# EAGLE board VF_MDS_Panel (EAGLE 9.6.2)
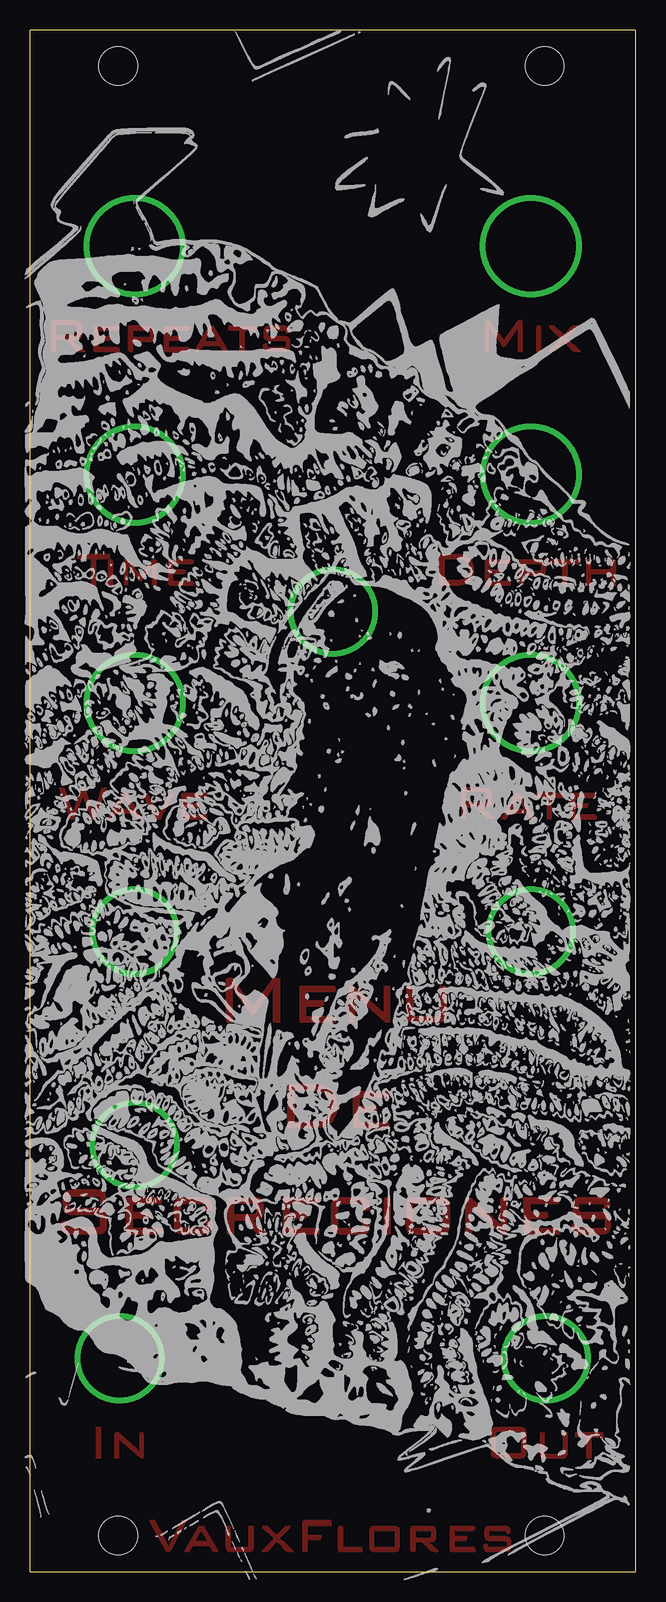
[diagram p0: board, top side]

Size 50.5 x 128.5 mm. Coordinates in mm from the lower left corner, seen from the top.
Copper layers (1*16): Top 0.035mm / dielectric 1.5mm / Bottom 0.035mm
Design rules "default": minimum track width 6mil, minimum drill 0.35mm, track to track 6mil, track to pad 6mil, pad to pad 6mil, via to via 6mil, smd to smd 6mil, copper to edge 40mil, drill to drill 6mil, minimum pad ring 10mil, minimum via ring 8mil, stop-mask expansion 4mil, vias tented up to drill 0mil, thermal gap 10mil
Net classes: 1 power: width 0.61 mm

## Footprints (pad centres in the part's own frame; a part is rotated, then mirrored left to right if it is on the bottom)
EURO_PANEL_10HP = hole 3.2: 7.5,3; 7.5,125.5; 43.06,125.5; 43.06,3

## Placement (x,y rotation side)
U$2  [EURO_PANEL_10HP]  -0.15,0 0 top

## Library data of the parts
U$2 = eurohelper

## Tracks (layer width: path | path; a pad name or v marks a point on that pad's centre or on a via)
GND
  pour Top (rank 3): 13.05,4.22 12.65,4.22 12.54,4.06 11.55,2.09 10.43,4.21 10.23,4.22 10.03,4.22 10.03,4.1 11.28,1.82 11.39,1.67 11.59,1.67 11.75,1.74
  pour Top (rank 3): 15.7,1.67 14.47,3.74 14.29,3.76 14.09,3.76 12.89,1.68 13.08,1.67 13.28,1.67 13.38,1.84 13.47,2.02 13.59,2.16 14.97,2.16 14.82,2.46 13.83,2.46 13.76,2.54 14.25,3.41 14.34,3.33 14.73,2.63 14.82,2.47 14.99,2.15 15.09,1.99 15.19,1.82 15.3,1.67 15.7,1.67
  pour Top (rank 3): 18.65,2.16 18.65,3.57 18.64,3.76 18.44,3.76 18.25,3.75 18.25,2.14 18.21,1.99 16.8,1.99 16.72,2.11 16.72,3.72 16.56,3.76 16.36,3.76 16.32,3.6 16.32,2.19 16.34,1.99 16.4,1.8 16.57,1.7 16.77,1.67 16.97,1.67 18.18,1.67 18.38,1.69 18.55,1.78 18.63,1.96
  pour Top (rank 3): 21.97,1.67 20.8,2.78 20.93,2.93 21.64,3.64 21.73,3.76 21.32,3.76 21.17,3.66 20.63,3.06 20.49,3.09 19.92,3.66 19.76,3.76 19.36,3.76 19.38,3.67 20.25,2.84 20.31,2.69 19.32,1.69 19.48,1.67 19.68,1.67 19.86,1.72 20.53,2.47 20.67,2.42 21.38,1.71 21.57,1.67
  pour Top (rank 3): 25.16,3.87 25.16,4.07 25.1,4.22 22.9,4.22 22.73,4.18 22.73,1.78 22.83,1.67 23.03,1.67 23.16,1.74 23.16,2.54 23.2,2.7 24.2,2.7 24.3,2.8 24.3,3 24.13,3.04 23.33,3.04 23.16,3.07 23.16,3.87 23.35,3.87
  pour Top (rank 3): 27.72,1.67 27.72,1.87 27.64,1.99 26.23,1.99 26.09,2.05 26.09,3.66 26,3.76 25.8,3.76 25.7,3.66 25.7,1.85 25.72,1.67
  pour Top (rank 3): 30.83,2.35 30.83,3.15 30.83,3.35 30.79,3.55 30.67,3.7 30.47,3.75 30.29,3.76 30.3,3.45 30.44,3.4 30.44,2 30.44,1.99 28.83,1.99 28.69,2.04 28.69,3.45 28.88,3.45 30.27,3.45 30.26,3.76 28.87,3.76 28.67,3.76 28.48,3.71 28.34,3.57 28.3,3.37 28.29,3.17 28.29,2.17 28.31,1.97 28.38,1.79 28.56,1.69 28.76,1.67 30.36,1.67 30.56,1.69 30.74,1.78 30.82,1.96 30.83,2.16
  pour Top (rank 3): 33.97,1.77 33.22,2.44 33.28,2.49 33.48,2.5 33.68,2.53 33.82,2.66 33.87,2.85 33.87,3.25 33.86,3.46 33.79,3.64 33.62,3.74 33.42,3.76 31.81,3.76 31.75,3.62 31.75,1.81 31.81,1.67 32.01,1.67 32.14,1.74 32.14,2.34 32.2,2.48 32.21,2.79 32.14,2.91 32.14,3.31 32.2,3.46 33.21,3.46 33.4,3.42 33.48,3.25 33.48,3.05 33.48,2.99 33.42,2.81 33.22,2.78 32.23,2.78 32.21,2.49 32.6,2.49 32.78,2.43 33.5,1.72 33.68,1.67 34.08,1.67
  pour Top (rank 3): 37.14,1.67 37.14,1.87 37.05,1.98 35.45,1.98 35.4,2.13 35.4,2.52 35.52,2.6 36.32,2.6 36.44,2.69 36.44,2.89 36.27,2.91 35.47,2.91 35.4,3.05 35.4,3.45 35.6,3.45 36.99,3.45 37.12,3.52 37.12,3.72 36.96,3.76 35.17,3.76 35.01,3.72 35.01,1.73 35.15,1.67
  pour Top (rank 3): 40.11,2.16 40.11,2.36 40.1,2.56 40.04,2.75 39.88,2.87 39.69,2.91 39.49,2.91 38.29,2.91 38.25,3.08 38.25,3.28 38.28,3.45 39.68,3.45 39.72,3.3 39.8,3.19 39.99,3.24 40.08,3.37 40.03,3.56 39.9,3.7 39.71,3.76 39.51,3.76 38.51,3.76 38.31,3.76 38.11,3.72 37.96,3.61 37.9,3.42 37.89,3.22 37.9,3.02 37.92,2.82 38.03,2.65 38.22,2.59 38.42,2.57 39.62,2.57 39.75,2.51 39.75,2.11 39.67,1.99 38.27,1.99 38.17,2.08 38.17,2.28 37.99,2.26 37.81,2.2 37.82,2 37.88,1.81 38.04,1.7 38.24,1.67 38.44,1.67 39.64,1.67 39.84,1.69 40.01,1.78 40.09,1.96
  pour Top (rank 3): 41.39,10.13 41.39,11.32 41.38,11.52 41.35,11.72 41.26,11.89 41.08,11.98 40.88,12.01 40.68,12.01 39.09,12.01 38.9,12.01 38.9,11.67 40.88,11.67 40.97,11.55 40.97,9.96 40.97,9.82 38.97,9.82 38.86,9.9 38.86,11.5 38.89,11.65 38.88,12 38.7,11.97 38.53,11.86 38.46,11.68 38.43,11.48 38.43,10.08 38.44,9.88 38.49,9.69 38.62,9.54 38.81,9.48 39,9.46 40.8,9.46 41,9.48 41.19,9.53 41.32,9.68 41.37,9.87 41.39,10.07
  pour Top (rank 3): 44.83,9.96 44.83,11.37 44.82,11.56 44.62,11.56 44.43,11.55 44.43,9.94 44.39,9.78 42.98,9.78 42.9,9.9 42.9,11.51 42.74,11.56 42.54,11.56 42.5,11.4 42.5,9.99 42.52,9.79 42.58,9.6 42.75,9.49 42.95,9.47 43.15,9.46 44.36,9.47 44.56,9.49 44.73,9.58 44.81,9.76
  pour Top (rank 3): 47.8,11.25 47.8,11.45 47.72,11.56 45.53,11.56 45.43,11.46 45.43,11.27 45.61,11.25 46.4,11.25 46.42,11.06 46.42,9.47 46.61,9.46 46.81,9.46 46.81,9.66 46.81,11.25
  pour Top (rank 3): 5.93,9.46 5.93,11.84 5.9,12.01 5.5,12.01 5.5,9.63 5.53,9.46
  pour Top (rank 3): 9.49,9.46 9.49,11.46 9.4,11.56 9.2,11.56 9.13,11.43 9.13,10.24 9.14,10.04 9.12,9.96 9,10.11 8.85,10.24 7.51,11.44 7.36,11.56 7.16,11.56 7.07,11.45 7.07,9.66 7.08,9.46 7.28,9.46 7.44,9.5 7.44,10.7 7.43,10.9 7.42,11.1 7.5,11.01 7.64,10.87 9.13,9.55 9.29,9.46
  pour Top (rank 3): 4.48,101.8 3.57,102.58 3.45,102.7 3.63,102.7 3.67,103.03 3.48,103.03 2.27,103.03 2.17,103.13 2.17,103.73 2.18,103.92 3.59,103.92 3.79,103.9 3.9,103.75 3.91,103.55 3.91,103.35 3.91,103.29 3.86,103.1 3.69,103.04 3.66,102.7 3.85,102.71 4.05,102.73 4.22,102.83 4.32,103 4.34,103.2 4.34,103.8 4.3,104 4.19,104.16 4,104.24 3.8,104.26 1.79,104.26 1.75,104.1 1.75,101.89 1.77,101.71 2.17,101.71 2.17,101.9 2.17,102.51 2.18,102.7 2.78,102.7 2.97,102.66 3.84,101.83 3.99,101.71 4.59,101.71
  pour Top (rank 3): 7.46,101.71 7.46,101.91 7.37,102.01 5.78,102.01 5.73,102.16 5.73,102.56 5.85,102.64 6.64,102.64 6.76,102.72 6.76,102.92 6.59,102.95 5.79,102.95 5.73,103.09 5.73,103.48 5.92,103.49 7.31,103.49 7.44,103.56 7.44,103.76 7.28,103.8 5.49,103.8 5.33,103.76 5.33,101.77 5.47,101.71
  pour Top (rank 3): 10.42,103.08 10.42,103.28 10.42,103.48 10.35,103.66 10.18,103.77 9.99,103.8 8.39,103.8 8.2,103.8 8.2,101.81 8.3,101.71 8.5,101.71 8.59,101.81 8.59,102.41 8.67,102.52 8.74,102.84 8.59,102.88 8.59,103.48 8.77,103.5 9.77,103.5 9.96,103.45 10.02,103.27 10.02,103.07 10.02,103.03 9.94,102.86 9.74,102.83 8.76,102.83 8.68,102.53 9.87,102.53 10.07,102.53 10.26,102.59 10.39,102.73 10.42,102.93
  pour Top (rank 3): 13.32,101.71 13.32,101.91 13.22,102.01 11.63,102.01 11.58,102.16 11.58,102.56 11.7,102.64 12.5,102.64 12.62,102.72 12.62,102.92 12.44,102.95 11.65,102.95 11.58,103.09 11.58,103.48 11.78,103.49 13.17,103.49 13.3,103.56 13.3,103.76 13.14,103.8 11.35,103.8 11.19,103.76 11.19,101.77 11.33,101.71
  pour Top (rank 3): 16.52,101.71 15.3,103.78 15.11,103.8 14.92,103.79 13.72,101.72 13.9,101.71 14.1,101.71 14.2,101.88 14.3,102.05 14.41,102.2 15.8,102.2 15.64,102.5 14.65,102.5 14.58,102.57 15.07,103.45 15.17,103.37 15.56,102.67 15.65,102.51 15.82,102.19 15.91,102.03 16.01,101.86 16.12,101.71 16.52,101.71
  pour Top (rank 3): 18.88,103.49 18.88,103.69 18.79,103.8 16.6,103.8 16.5,103.71 16.5,103.51 16.68,103.49 17.48,103.49 17.49,103.3 17.49,101.72 17.68,101.71 17.88,101.71 17.88,101.9 17.88,103.49
  pour Top (rank 3): 21.71,102.2 21.71,102.4 21.7,102.6 21.64,102.79 21.48,102.91 21.29,102.94 21.09,102.95 19.89,102.95 19.85,103.11 19.85,103.31 19.88,103.49 21.28,103.49 21.32,103.33 21.4,103.23 21.59,103.27 21.68,103.4 21.63,103.6 21.5,103.74 21.31,103.79 21.11,103.8 20.11,103.8 19.91,103.8 19.72,103.76 19.56,103.64 19.5,103.45 19.49,103.25 19.5,103.05 19.52,102.86 19.63,102.69 19.82,102.63 20.02,102.61 21.22,102.61 21.35,102.55 21.35,102.15 21.27,102.02 19.87,102.02 19.77,102.12 19.77,102.32 19.59,102.3 19.41,102.24 19.42,102.04 19.48,101.85 19.64,101.74 19.84,101.71 20.04,101.71 21.24,101.71 21.44,101.73 21.61,101.82 21.69,102
  pour Top (rank 3): 41.08,101.71 41.08,104.12 41.02,104.26 40.82,104.26 40.65,104.19 39.61,102.71 39.5,102.65 38.29,104.25 38.09,104.26 37.95,104.2 37.95,101.79 38.06,101.71 38.27,101.71 38.31,101.87 38.31,103.47 38.3,103.67 38.31,103.73 38.41,103.56 38.53,103.4 39.36,102.26 39.48,102.11 39.64,102.19 40.55,103.52 40.65,103.69 40.7,103.73 40.69,103.53 40.69,103.33 40.69,101.72 40.88,101.71
  pour Top (rank 3): 42.61,101.71 42.61,103.69 42.51,103.8 42.32,103.8 42.22,103.7 42.22,101.71 42.41,101.71
  pour Top (rank 3): 45.91,101.71 44.75,102.82 44.87,102.96 45.58,103.68 45.67,103.8 45.27,103.8 45.11,103.69 44.57,103.1 44.43,103.13 43.86,103.7 43.7,103.8 43.3,103.8 43.33,103.71 44.2,102.87 44.25,102.73 43.26,101.73 43.42,101.71 43.62,101.71 43.8,101.76 44.47,102.51 44.61,102.46 45.32,101.74 45.51,101.71
  pour Top (rank 3): 6.71,84.44 6.71,84.64 6.65,84.78 4.05,84.78 3.95,84.68 3.95,84.48 4.1,84.44 5.1,84.44 5.11,84.25 5.11,82.24 5.3,82.23 5.5,82.23 5.54,82.4 5.54,84.41 5.71,84.44
  pour Top (rank 3): 6.92,82.23 6.92,84.22 6.82,84.32 6.62,84.32 6.52,84.22 6.52,82.24 6.72,82.23
  pour Top (rank 3): 10.57,82.23 10.57,84.24 10.46,84.33 10.26,84.33 10.12,84.21 9.31,83.06 9.19,83.04 8.21,84.31 8.02,84.33 7.87,84.28 7.87,82.27 8.04,82.23 8.2,82.27 8.2,83.67 8.19,83.87 8.24,83.81 8.34,83.64 9.08,82.69 9.22,82.56 9.36,82.67 10.08,83.64 10.18,83.81 10.21,83.87 10.2,83.67 10.2,82.27 10.36,82.23
  pour Top (rank 3): 13.67,82.23 13.67,82.43 13.58,82.54 11.98,82.54 11.93,82.69 11.93,83.09 12.05,83.17 12.85,83.17 12.97,83.25 12.97,83.45 12.8,83.48 12,83.48 11.93,83.61 11.93,84.01 12.13,84.02 13.52,84.02 13.65,84.09 13.65,84.29 13.49,84.33 11.7,84.33 11.54,84.29 11.54,82.3 11.68,82.23
  pour Top (rank 3): 37.03,83.63 37,83.83 36.94,84.02 36.86,84.2 36.75,84.36 36.61,84.51 36.44,84.62 36.26,84.69 36.06,84.74 35.87,84.77 35.67,84.78 35.48,84.78 35.47,84.44 35.66,84.43 35.86,84.41 36.05,84.37 36.23,84.29 36.39,84.17 36.5,84 36.57,83.81 36.59,83.62 36.59,83.52 36.58,83.32 36.54,83.13 36.46,82.95 36.33,82.8 36.16,82.7 35.97,82.64 35.77,82.6 35.57,82.59 35.37,82.59 34.58,82.59 34.54,82.76 34.54,84.35 34.66,84.44 35.45,84.44 35.46,84.78 34.27,84.78 34.12,84.73 34.12,82.34 34.21,82.23 35.61,82.23 35.81,82.24 36.01,82.27 36.2,82.31 36.39,82.37 36.56,82.47 36.71,82.6 36.83,82.76 36.92,82.94 36.99,83.13 37.02,83.32 37.03,83.52
  pour Top (rank 3): 40.06,82.23 40.06,82.43 39.97,82.54 38.38,82.54 38.33,82.69 38.33,83.09 38.45,83.17 39.25,83.17 39.36,83.25 39.36,83.45 39.19,83.48 38.4,83.48 38.33,83.61 38.33,84.01 38.52,84.02 39.92,84.02 40.04,84.09 40.04,84.29 39.89,84.33 38.09,84.33 37.94,84.29 37.94,82.3 38.07,82.23
  pour Top (rank 3): 43.03,83.61 43.03,83.81 43.02,84.01 42.95,84.19 42.78,84.3 42.59,84.33 41,84.33 40.8,84.32 40.8,82.33 40.9,82.23 41.1,82.23 41.2,82.34 41.2,82.93 41.27,83.04 41.34,83.36 41.2,83.4 41.2,84 41.37,84.02 42.37,84.02 42.56,83.98 42.63,83.8 42.63,83.6 42.63,83.56 42.54,83.39 42.35,83.36 41.36,83.36 41.29,83.05 42.47,83.05 42.67,83.06 42.86,83.12 42.99,83.26 43.03,83.45
  pour Top (rank 3): 45.79,84.02 45.79,84.22 45.7,84.33 43.52,84.33 43.42,84.23 43.42,84.04 43.6,84.02 44.39,84.02 44.4,83.83 44.4,82.24 44.59,82.23 44.79,82.23 44.8,82.43 44.8,84.02
  pour Top (rank 3): 48.85,82.23 48.85,84.24 48.73,84.32 48.53,84.32 48.45,84.2 48.45,83.6 48.36,83.48 46.96,83.48 46.78,83.51 46.78,84.31 46.59,84.32 46.39,84.32 46.39,84.13 46.39,82.32 46.5,82.23 46.7,82.23 46.78,82.35 46.78,83.15 46.97,83.17 48.37,83.17 48.45,83.04 48.45,82.24 48.64,82.23
  pour Top (rank 3): 6.38,65.3 6.18,65.3 5.99,65.28 5.34,63.38 5.27,63.35 4.6,65.24 4.44,65.3 4.29,65.22 3.59,63.34 3.52,63.39 2.88,65.29 2.68,65.3 2.48,65.3 2.5,65.15 3.32,62.88 3.42,62.75 3.62,62.75 3.74,62.86 4.38,64.55 4.45,64.61 5.08,62.92 5.16,62.75 5.36,62.75 5.49,62.85
  pour Top (rank 3): 9.31,62.75 8.09,64.82 7.9,64.84 7.71,64.83 6.51,62.76 6.69,62.75 6.89,62.75 6.99,62.92 7.09,63.09 7.2,63.24 8.59,63.24 8.43,63.54 7.44,63.54 7.38,63.62 7.86,64.49 7.96,64.41 8.35,63.71 8.44,63.55 8.61,63.23 8.7,63.07 8.8,62.9 8.91,62.75 9.31,62.75
  pour Top (rank 3): 12.03,64.84 11.83,64.84 11.64,64.84 10.8,63.25 10.7,63.24 9.83,64.8 9.65,64.84 9.45,64.84 9.44,64.73 10.54,62.83 10.69,62.75 10.89,62.75 10.98,62.92
  pour Top (rank 3): 14.76,62.75 14.76,62.95 14.66,63.05 13.07,63.05 13.02,63.21 13.02,63.6 13.14,63.68 13.94,63.68 14.05,63.77 14.05,63.96 13.88,63.99 13.09,63.99 13.02,64.13 13.02,64.53 13.21,64.53 14.61,64.53 14.74,64.6 14.74,64.8 14.58,64.84 12.78,64.84 12.63,64.8 12.63,62.81 12.76,62.75
  pour Top (rank 3): 38.72,62.84 37.8,63.62 37.68,63.74 37.87,63.74 37.9,64.07 37.71,64.07 36.51,64.07 36.41,64.17 36.41,64.77 36.42,64.97 37.82,64.97 38.02,64.94 38.14,64.79 38.14,64.59 38.14,64.39 38.14,64.33 38.1,64.14 37.93,64.08 37.89,63.74 38.08,63.75 38.28,63.77 38.45,63.87 38.55,64.04 38.57,64.24 38.57,64.84 38.54,65.04 38.42,65.2 38.24,65.28 38.04,65.3 36.03,65.3 35.98,65.14 35.98,62.93 36,62.75 36.4,62.75 36.41,62.94 36.41,63.55 36.41,63.74 37.01,63.74 37.2,63.7 38.07,62.87 38.22,62.75 38.83,62.75
  pour Top (rank 3): 42.13,62.75 40.91,64.82 40.72,64.84 40.53,64.83 39.33,62.76 39.51,62.75 39.71,62.75 39.81,62.92 39.9,63.09 40.02,63.24 41.41,63.24 41.25,63.54 40.26,63.54 40.19,63.62 40.68,64.49 40.77,64.41 41.17,63.71 41.26,63.55 41.43,63.23 41.52,63.07 41.62,62.9 41.73,62.75 42.13,62.75
  pour Top (rank 3): 44.49,64.53 44.49,64.73 44.4,64.84 42.21,64.84 42.11,64.75 42.11,64.55 42.29,64.53 43.09,64.53 43.1,64.35 43.1,62.76 43.29,62.75 43.49,62.75 43.49,62.94 43.49,64.53
  pour Top (rank 3): 47.21,62.75 47.21,62.95 47.12,63.05 45.53,63.05 45.48,63.21 45.48,63.6 45.6,63.68 46.4,63.68 46.51,63.77 46.51,63.96 46.34,63.99 45.54,63.99 45.48,64.13 45.48,64.53 45.67,64.53 47.07,64.53 47.19,64.6 47.19,64.8 47.03,64.84 45.24,64.84 45.08,64.8 45.08,62.81 45.22,62.75
  pour Top (rank 3): 20.83,45.8 20.83,49.4 20.67,49.44 20.47,49.44 20.27,49.43 18.67,47.13 18.55,47.17 16.87,49.42 16.68,49.44 16.48,49.44 16.36,49.35 16.36,45.95 16.41,45.8 16.81,45.8 16.88,45.93 16.88,48.34 16.87,48.54 16.85,48.74 16.91,48.65 17,48.47 17.12,48.31 18.54,46.37 18.72,46.4 20.08,48.39 20.19,48.56 20.28,48.74 20.3,48.65 20.28,48.25 20.28,45.84 20.43,45.8
  pour Top (rank 3): 25.51,45.8 25.51,46.19 25.35,46.23 23.16,46.23 23.04,46.31 23.04,47.1 23.21,47.13 24.4,47.13 24.51,47.22 24.51,47.42 24.47,47.57 23.07,47.57 23.04,47.74 23.04,48.34 23.23,48.34 25.42,48.34 25.49,48.48 25.49,48.67 25.4,48.79 22.61,48.79 22.47,48.73 22.47,45.94 22.53,45.8
  pour Top (rank 3): 30.02,45.8 30.02,48.6 30.01,48.79 29.61,48.79 29.5,48.7 29.5,46.9 29.51,46.7 29.54,46.5 29.48,46.53 29.35,46.68 29.2,46.82 27.11,48.69 26.95,48.79 26.75,48.79 26.57,48.77 26.57,45.97 26.59,45.8 26.99,45.8 27.09,45.9 27.09,47.71 27.08,47.91 27.06,48.1 27.11,48.09 27.24,47.94 27.38,47.8 29.63,45.8 29.82,45.8
  pour Top (rank 3): 34.73,46.5 34.73,48.71 34.61,48.79 34.2,48.79 34.15,48.64 34.15,46.43 34.14,46.25 32.13,46.25 31.97,46.28 31.97,48.69 31.86,48.79 31.46,48.79 31.4,48.65 31.4,46.44 31.42,46.24 31.48,46.05 31.61,45.9 31.79,45.83 31.99,45.8 32.19,45.8 34,45.8 34.2,45.81 34.39,45.84 34.57,45.94 34.67,46.11 34.72,46.3
  pour Top (rank 3): 25.62,38.92 25.6,39.12 25.56,39.32 25.5,39.51 25.42,39.69 25.33,39.87 25.21,40.03 25.07,40.17 24.92,40.3 24.75,40.4 24.56,40.48 24.37,40.53 24.17,40.57 23.97,40.59 23.77,40.61 23.59,40.62 23.5,40.12 23.69,40.11 23.89,40.09 24.09,40.06 24.28,40.01 24.46,39.93 24.63,39.82 24.77,39.67 24.87,39.5 24.94,39.31 24.98,39.12 25,38.92 25,38.82 24.99,38.62 24.97,38.42 24.92,38.23 24.84,38.04 24.72,37.88 24.57,37.75 24.4,37.65 24.21,37.58 24.02,37.53 23.82,37.51 23.62,37.49 23.42,37.49 22.22,37.49 22.07,37.54 22.07,39.94 22.09,40.12 23.48,40.12 23.56,40.62 23.37,40.62 21.57,40.62 21.47,40.52 21.47,37.12 21.52,36.98 23.52,36.98 23.72,36.98 23.92,37 24.12,37.02 24.32,37.05 24.51,37.1 24.7,37.17 24.88,37.27 25.04,37.39 25.18,37.52 25.31,37.68 25.41,37.85 25.49,38.03 25.55,38.22 25.59,38.42 25.61,38.62 25.62,38.82
  pour Top (rank 3): 29.96,36.98 29.96,37.38 29.8,37.41 27.61,37.41 27.48,37.49 27.48,38.28 27.65,38.31 28.85,38.31 28.96,38.4 28.96,38.6 28.91,38.76 27.52,38.76 27.48,38.92 27.48,39.52 27.67,39.52 29.86,39.52 29.93,39.66 29.93,39.85 29.84,39.97 27.06,39.97 26.92,39.91 26.92,37.12 26.97,36.98
  pour Top (rank 3): 6.41,29.02 6.41,29.42 6.41,29.62 6.38,29.82 6.31,30.01 6.18,30.16 6,30.24 5.8,30.28 5.6,30.29 3.39,30.29 3.27,30.37 3.27,31.18 3.35,31.3 5.75,31.3 5.85,31.2 5.85,30.8 6.02,30.82 6.21,30.88 6.37,30.96 6.36,31.16 6.33,31.36 6.25,31.54 6.11,31.68 5.92,31.76 5.73,31.79 5.53,31.8 3.52,31.8 3.32,31.78 3.12,31.74 2.95,31.65 2.82,31.49 2.76,31.3 2.74,31.1 2.73,30.9 2.73,30.7 2.74,30.5 2.76,30.3 2.8,30.1 2.91,29.94 3.08,29.84 3.28,29.78 3.48,29.76 3.68,29.76 5.68,29.76 5.86,29.74 5.86,28.74 5.73,28.67 3.33,28.67 3.15,28.7 3.15,29.1 3.11,29.24 2.72,29.15 2.59,29.05 2.6,28.85 2.63,28.65 2.69,28.46 2.81,28.3 2.99,28.22 3.19,28.17 3.39,28.16 5.59,28.16 5.79,28.17 5.99,28.2 6.18,28.28 6.31,28.43 6.38,28.62 6.41,28.82
  pour Top (rank 3): 11.04,28.16 11.04,28.56 10.88,28.6 8.69,28.6 8.57,28.67 8.57,29.46 8.74,29.49 9.93,29.49 10.04,29.58 10.04,29.78 10,29.94 8.6,29.94 8.57,30.1 8.57,30.7 8.76,30.7 10.95,30.7 11.02,30.84 11.02,31.04 10.93,31.15 8.14,31.15 8,31.09 8,28.3 8.06,28.16
  pour Top (rank 3): 15.24,28.86 15.24,29.06 15.2,29.22 14.81,29.3 14.68,29.25 14.68,28.66 14.53,28.61 12.73,28.61 12.59,28.67 12.59,30.66 12.74,30.7 14.53,30.7 14.68,30.65 14.68,30.25 14.69,30.06 15.08,30.13 15.24,30.19 15.24,30.39 15.23,30.59 15.2,30.79 15.12,30.96 14.96,31.08 14.76,31.13 14.57,31.15 12.77,31.15 12.57,31.14 12.38,31.11 12.2,31.02 12.09,30.86 12.04,30.67 12.03,30.47 12.03,28.88 12.03,28.68 12.07,28.48 12.16,28.31 12.34,28.21 12.53,28.17 12.73,28.16 14.52,28.16 14.72,28.17 14.92,28.21 15.09,28.3 15.19,28.47 15.23,28.66
  pour Top (rank 3): 19.74,28.18 18.55,29.24 18.52,29.32 18.51,29.75 17.13,29.75 17,29.82 17,30.62 17.1,30.71 18.5,30.71 18.7,30.7 18.86,30.6 18.91,30.41 18.91,30.21 18.91,30.05 18.88,29.85 18.72,29.75 18.53,29.75 18.52,29.33 18.71,29.33 18.91,29.34 19.11,29.36 19.29,29.44 19.41,29.59 19.46,29.78 19.47,29.98 19.47,30.58 19.45,30.77 19.36,30.95 19.21,31.08 19.02,31.14 18.82,31.15 16.63,31.15 16.44,31.14 16.44,28.35 16.44,28.16 16.84,28.16 17,28.19 17,29.19 17.06,29.33 17.66,29.33 17.85,29.3 18.98,28.19 19.17,28.16 19.77,28.16
  pour Top (rank 3): 24.14,28.16 24.14,28.56 23.98,28.6 21.79,28.6 21.66,28.67 21.66,29.46 21.83,29.49 23.03,29.49 23.13,29.58 23.13,29.78 23.09,29.94 21.7,29.94 21.66,30.1 21.66,30.7 21.85,30.7 24.04,30.7 24.11,30.84 24.11,31.04 24.02,31.15 21.24,31.15 21.1,31.09 21.1,28.3 21.15,28.16
  pour Top (rank 3): 28.33,28.86 28.33,29.06 28.29,29.22 27.9,29.3 27.77,29.25 27.77,28.66 27.62,28.61 25.82,28.61 25.68,28.67 25.68,30.66 25.83,30.7 27.63,30.7 27.77,30.65 27.77,30.25 27.78,30.06 28.17,30.13 28.33,30.19 28.33,30.39 28.32,30.59 28.29,30.79 28.21,30.96 28.05,31.08 27.86,31.13 27.66,31.15 25.86,31.15 25.67,31.14 25.47,31.11 25.29,31.02 25.18,30.86 25.13,30.67 25.12,30.47 25.12,28.88 25.13,28.68 25.16,28.48 25.26,28.31 25.43,28.21 25.62,28.17 25.82,28.16 27.61,28.16 27.81,28.17 28.01,28.21 28.18,28.3 28.28,28.47 28.32,28.66
  pour Top (rank 3): 30.08,28.16 30.08,31 30.02,31.14 29.62,31.14 29.51,31.04 29.51,28.2 29.67,28.16
  pour Top (rank 3): 35,28.91 35,30.32 35,30.52 34.98,30.72 34.91,30.91 34.78,31.05 34.59,31.12 34.39,31.15 34.19,31.15 32.18,31.15 31.99,31.15 31.98,30.7 34.37,30.7 34.44,30.57 34.44,28.76 34.44,28.61 32.03,28.61 31.94,28.72 31.94,30.53 31.96,30.69 31.97,31.14 31.78,31.12 31.59,31.05 31.46,30.9 31.4,30.71 31.37,30.51 31.37,30.31 31.37,28.91 31.38,28.71 31.41,28.51 31.5,28.33 31.66,28.22 31.86,28.17 32.06,28.16 34.27,28.16 34.47,28.17 34.67,28.2 34.84,28.3 34.95,28.47 34.99,28.66 35,28.86
  pour Top (rank 3): 39.77,28.16 39.77,30.96 39.75,31.15 39.35,31.15 39.24,31.06 39.24,29.26 39.26,29.06 39.28,28.86 39.22,28.89 39.09,29.04 38.95,29.18 36.85,31.05 36.69,31.15 36.49,31.15 36.31,31.13 36.31,28.33 36.34,28.16 36.74,28.16 36.83,28.26 36.83,30.07 36.82,30.27 36.8,30.47 36.85,30.45 36.98,30.3 37.12,30.16 39.37,28.17 39.57,28.16
  pour Top (rank 3): 44.19,28.16 44.19,28.56 44.03,28.6 41.84,28.6 41.71,28.67 41.71,29.46 41.88,29.49 43.08,29.49 43.18,29.58 43.18,29.78 43.14,29.94 41.75,29.94 41.71,30.1 41.71,30.7 41.9,30.7 44.09,30.7 44.16,30.84 44.16,31.04 44.07,31.15 41.29,31.15 41.15,31.09 41.15,28.3 41.2,28.16
  pour Top (rank 3): 48.43,28.86 48.43,29.26 48.41,29.46 48.36,29.65 48.24,29.81 48.06,29.89 47.86,29.92 47.66,29.93 45.87,29.93 45.78,30.04 45.78,30.64 45.92,30.7 47.71,30.7 47.88,30.67 47.88,30.47 47.92,30.32 48.31,30.4 48.39,30.53 48.36,30.73 48.3,30.92 48.16,31.06 47.97,31.12 47.77,31.15 47.57,31.15 45.97,31.15 45.78,31.14 45.58,31.09 45.41,30.99 45.32,30.82 45.28,30.62 45.27,30.42 45.27,30.22 45.28,30.03 45.3,29.83 45.38,29.64 45.53,29.53 45.73,29.47 45.92,29.45 47.92,29.45 47.92,28.65 47.76,28.61 45.77,28.61 45.66,28.7 45.66,28.9 45.61,29.04 45.22,28.96 45.15,28.83 45.17,28.63 45.22,28.43 45.33,28.27 45.51,28.2 45.71,28.16 45.91,28.16 47.7,28.16 47.9,28.17 48.1,28.21 48.27,28.3 48.37,28.47 48.42,28.66
N$1  (via drill 6.5)
  other vias: 8.74,35.56
N$33  (via drill 7.5)
  other vias: 8.74,110.49
N$34  (via drill 7.5)
  other vias: 41.76,110.49
N$35  (via drill 7.5)
  other vias: 41.76,91.44
N$36  (via drill 7.5)
  other vias: 8.74,91.44
N$37  (via drill 7.5)
  other vias: 8.74,72.39
N$38  (via drill 7.5)
  other vias: 41.76,72.39
N$39  (via drill 6.5)
  other vias: 25.25,80.01
N$41  (via drill 6.5)
  other vias: 8.74,53.34
N$42  (via drill 6.5)
  other vias: 43.03,17.78
N$43  (via drill 6.5)
  other vias: 7.47,17.78
N$44  (via drill 6.5)
  other vias: 41.76,53.34